# Allegro board USBHUB_V11A.brd
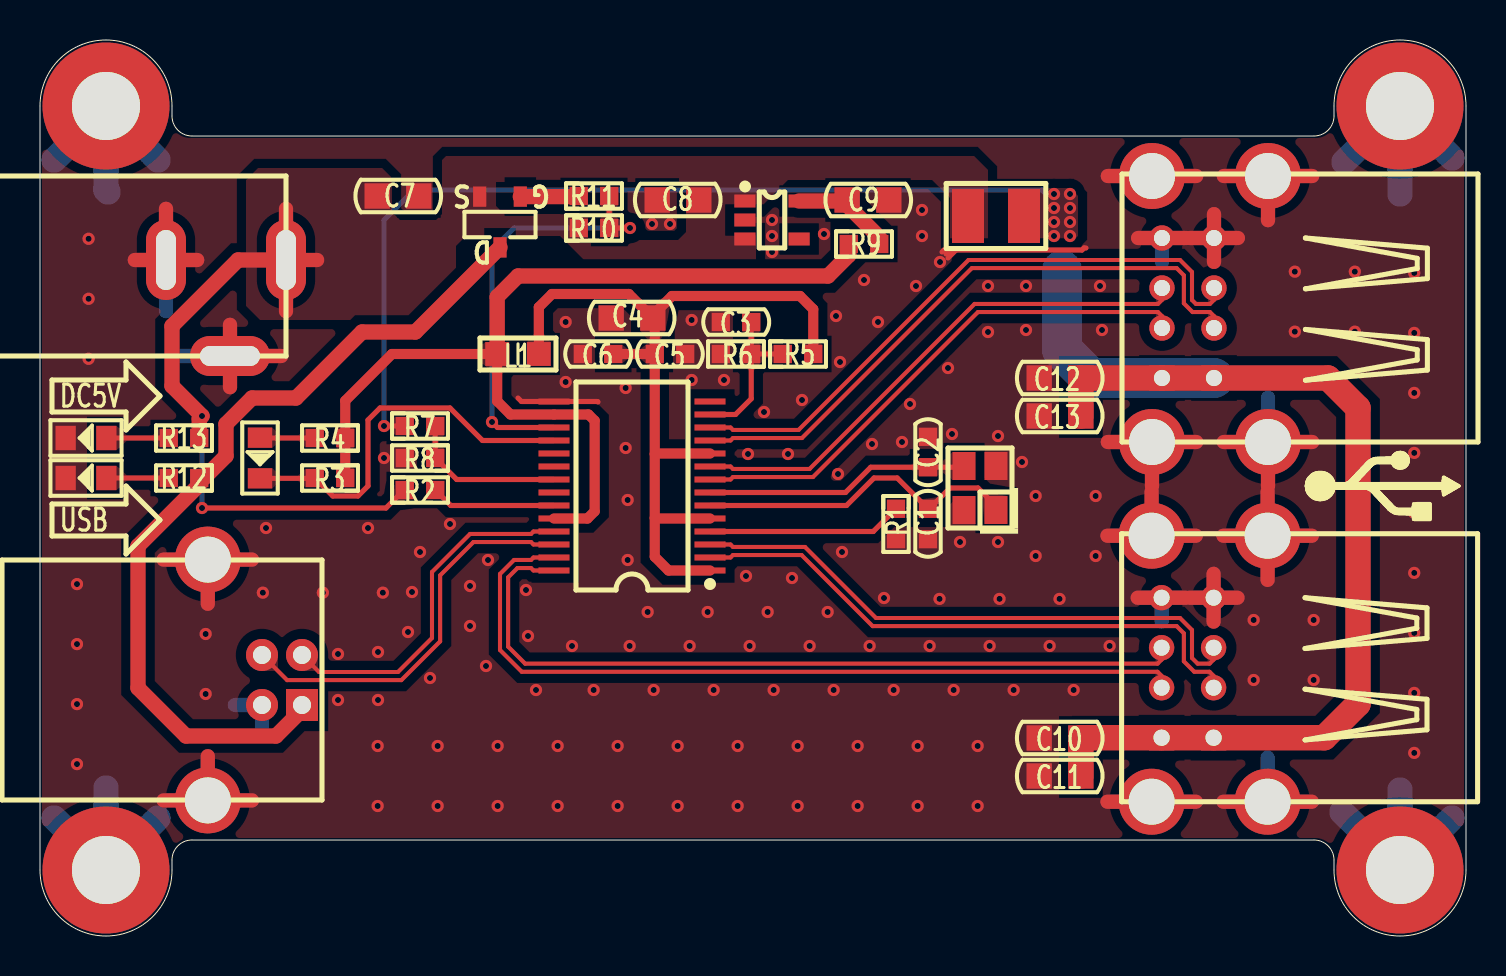
[diagram p0: board, top side]
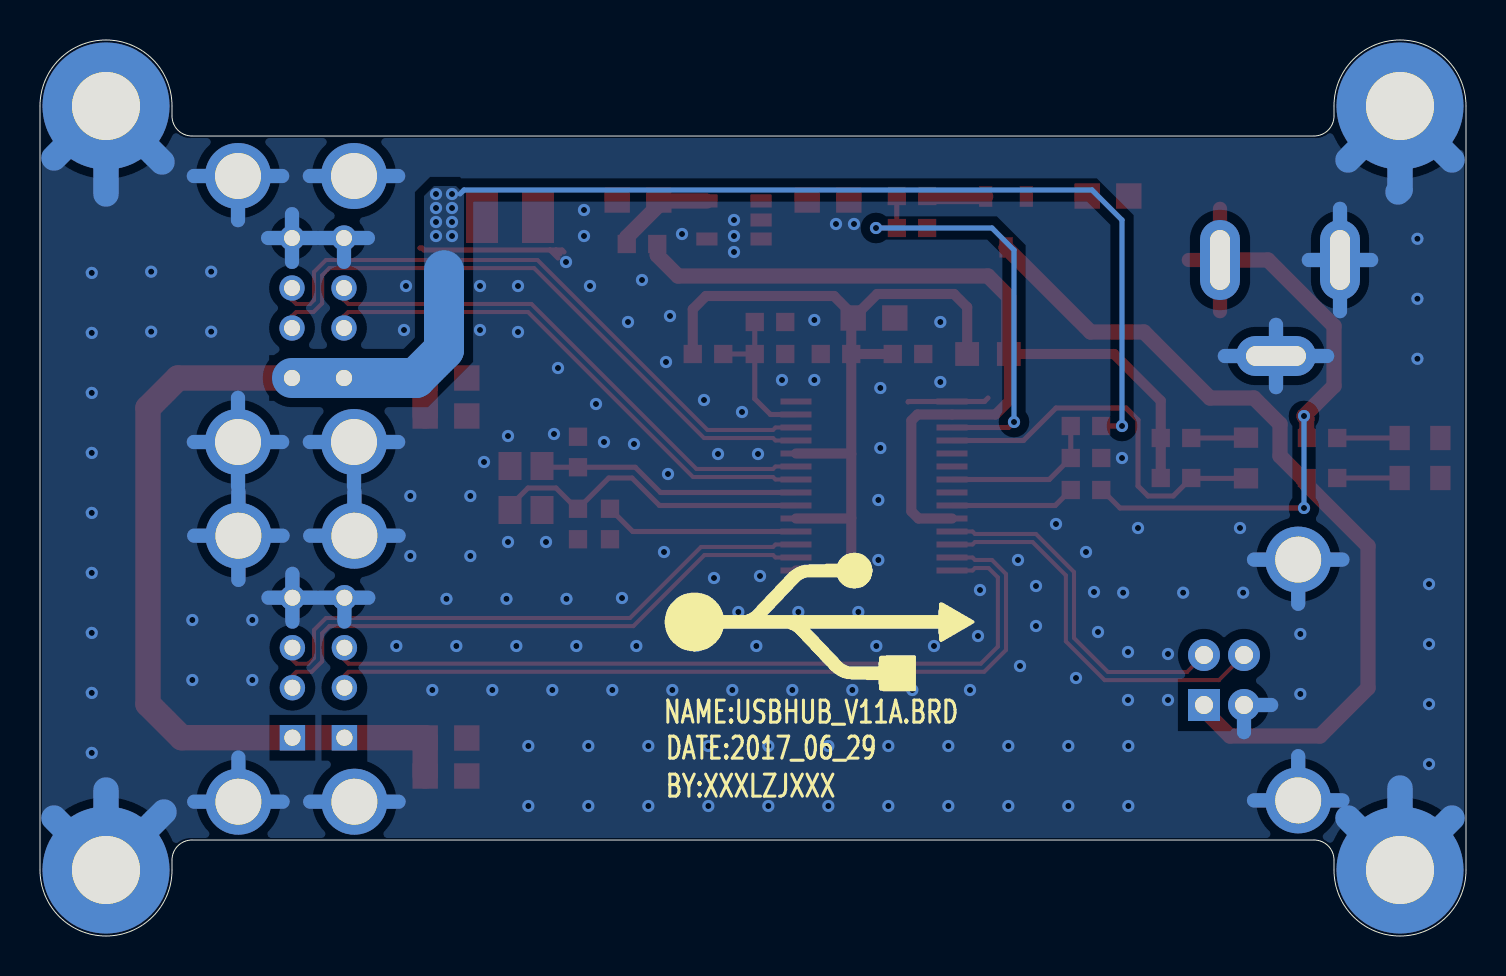
[diagram p1: board, bottom side, seen from below]

Outline 71.3 x 44.8 mm; copper layers: TOP, BOTTOM. Coordinates in mm from the lower left corner of the outline.
Outline path: 0,41.5 arc(0.97,43.83) 3.3,44.8 arc(5.63,43.83) 6.6,41.5 6.6,41 arc(6.89,40.29) 7.6,40 63.7,40 arc(64.41,40.29) 64.7,41 64.7,41.5 arc(65.67,43.83) 68,44.8 arc(70.33,43.83) 71.3,41.5 71.3,3.3 arc(70.33,0.97) 68,0 arc(65.67,0.97) 64.7,3.3 64.7,3.8 arc(64.41,4.51) 63.7,4.8 7.6,4.8 arc(6.89,4.51) 6.6,3.8 6.6,3.3 arc(5.63,0.97) 3.3,0 arc(0.97,0.97) 0,3.3 0,41.5

## Design rules (mm)
constraint set DEFAULT: min track width 0.203, pair gap 0.203
net group DP1: nets DM0 DP0
net group DP2: nets DM1 DP1
net group DP3: nets DM2 DP2
net group DP4: nets DM3 DP3
net group DP5: nets DM4 DP4

## Placement (name value [footprint] x y rotation side)
C1  20pF_50V  [CC0603]  44.4 20.6 90 top
C2  20pF_50V  [CC0603]  44.4 24.2 270 top
C3  1uF_50V  [CC0603]  34.8 30.7 0 top
C4  10uF_25V  [CC0805]  29.6 30.9 180 top
C5  0.1uF_50V  [CC0603]  31.5 29.1 180 top
C6  0.1uF_50V  [CC0603]  27.9 29.1 0 top
C7  10uF_25V  [CC0805]  17.9 37 0 top
C8  10uF_25V  [CC0805]  31.9 36.8 180 top
C9  10uF_25V  [CC0805]  41.4 36.8 0 top
C10  10uF_25V  [CC0805]  51 9.9 180 top
C11  10uF_25V  [CC0805]  51 8 180 top
C12  10uF_25V  [CC0805]  51 27.9 180 top
C13  10uF_25V  [CC0805]  51 26 180 top
D1  LED_GREEN  [LED0805]  11 23.9 270 top
D2  LED_GREEN  [LED0805]  2.3 22.9 180 top
D3  LED_GREEN  [LED0805]  2.3 24.9 180 top
DC1  -  [DC005]  6.3 33.8 0 top
F1  SMD1210-200  [SMD-1210]  47.8 36 180 top
L1  BEAD_BLM21PG600  [LC0805]  23.9 29.1 180 top
MH1  HOLD-M3  [HOLD250D134]  3.3 3.3 0 top
MH2  HOLD-M3  [HOLD250D134]  68 3.3 0 top
MH3  HOLD-M3  [HOLD250D134]  68 41.5 0 top
MH4  HOLD-M3  [HOLD250D134]  3.3 41.5 0 top
NOREF  -  []  3.3 0 90 top
NOREF#2  -  []  0 5.1 0 top
Q1  AO3415  [SOT23_GSD]  23 35.7 180 top
R1  680R  [RC0603]  42.8 20.6 90 top
R2  0R/NI  [RC0603]  19 22.3 180 top
R3  100K  [RC0603]  14.5 22.9 0 top
R4  1K  [RC0603]  14.5 24.9 0 top
R5  10K  [RC0603]  37.9 29.1 180 top
R6  47K  [RC0603]  34.8 29.1 0 top
R7  30K  [RC0603]  19 25.5 180 top
R8  30K  [RC0603]  19 23.9 0 top
R9  0R  [RC0603]  41.2 34.6 180 top
R10  510K  [RC0603]  27.7 35.4 180 top
R11  4.7K  [RC0603]  27.7 37 180 top
R12  2K  [RC0603]  7.2 22.9 0 top
R13  2K  [RC0603]  7.2 24.9 0 top
U1  X322512MSB4SI  [X-4P-3R2X2R5-SMD]  47 22.4 90 top
U2  GL850G  [TSSOP28]  29.6 22.5 90 top
U3  SPX3819M5-L-1-5/TR  [SOT23-5]  36.6 35.8 270 top
USB1  -  [USB-A-DOUBLE]  56.1 31.4 0 top
USB2  -  [USB-A-DOUBLE]  56.08 13.41 0 top
USB3  -  [USB-B]  13.1 12.8 270 top

## Library data of the parts
C1 C2 C7-C13 = CAP NP_2
C3 C5 C6 = CAP NP
C4 = C_Generic
D1-D3 = LED_4
DC1 = DC005
F1 = FUSE
L1 = IND_BEAD_0805_600OHM_200MA
MH1-MH4 = Hold_1
Q1 = MOS-P_0
R1-R13 = R_Generic
U1 = TSX-3225
U2 = GL850G
U3 = SPX3819M5-L-1-2
USB1 USB2 = USB-A-DOUBLE
USB3 = USB-B

## Footprints (pads in the part's own frame, mm; a bottom-side part is the same pattern mirrored in y, then rotated)
CC0603
  rect 0.914x0.914 smd: 1(-0.762,0) 2(0.762,0)
CC0805
  rect 1.27x1.27 smd: 1(-1.041,0) 2(1.041,0)
DC005
  oval 2x4 hole 1x3: 1(6,0) 2(0,0)
  oval 4x2 hole 3x1: 3(3.2,-4.8)
HOLD250D134
  round 6.35 hole 3.404: 1(0,0)
LC0805
  rect 1.194x1.194 smd: 1(-1.041,0) 2(1.041,0)
LED0805
  rect 1.016x1.219 smd: 1(-1.016,0) 2(1.016,0)
RC0603
  rect 0.914x0.914 smd: 1(-0.762,0) 2(0.762,0)
SMD-1210
  rect 1.6x2.7 smd: 1(-1.4,0) 2(1.4,0)
SOT23-5
  rect 0.65x1.06 smd: 1(-0.95,-1.354) 2(0,-1.354) 3(0.95,-1.354) 4(0.95,1.354) 5(-0.95,1.354)
SOT23_GSD
  rect 0.66x1.016 smd: 1(-1.016,-1.27) 2(1.016,-1.27) 3(0,1.27)
TSSOP28
  rect 0.3x1.55 smd: 1(-4.225,-3.9) 2(-3.575,-3.9) 3(-2.925,-3.9) 4(-2.275,-3.9) 5(-1.625,-3.9) 6(-0.975,-3.9) 7(-0.325,-3.9) 8(0.325,-3.9) 9(0.975,-3.9) 10(1.625,-3.9) 11(2.275,-3.9) 12(2.925,-3.9) 13(3.575,-3.9) 14(4.225,-3.9) 15(4.225,3.9) 16(3.575,3.9) 17(2.925,3.9) 18(2.275,3.9) 19(1.625,3.9) 20(0.975,3.9) 21(0.325,3.9) 22(-0.325,3.9) 23(-0.975,3.9) 24(-1.625,3.9) 25(-2.275,3.9) 26(-2.925,3.9) 27(-3.575,3.9) 28(-4.225,3.9)
USB-A-DOUBLE
  rect 1.27x1.27 hole 0.813: 1(2.6,-3.5) 5(0,-3.5)
  round 1.27 hole 0.8: 2(2.6,-1) 3(2.6,1) 4(2.6,3.5) 6(0,-1) 7(0,1) 8(0,3.5)
  round 3.3 hole 2.3: 9(-0.5,6.6) 10(5.3,6.6) 11(5.3,-6.7) 12(-0.5,-6.7)
USB-B
  rect 1.6x1.6 hole 0.9: 1(1.25,0)
  round 1.6 hole 0.9: 2(-1.25,0) 3(-1.25,-2) 4(1.25,-2)
  round 3.3 hole 2.3: 5(6.02,-4.71) 6(-6.02,-4.71)
X-4P-3R2X2R5-SMD
  rect 1.4x1.15 smd: 1(-1.1,-0.8) 2(1.1,-0.8) 3(1.1,0.8) 4(-1.1,0.8)

## Nets
AVDD: C4.1 C5.2 C6.2 L1.1 R5.1 U2.1 U2.5 U2.10
DVDD: L1.2(B) R3.2 R4.2 R9.2 U2.16 U2.24
GND: C1.1 C2.1 C3.1 C4.2 C5.1 C6.1 C7.2 C8.2 C9.2 C10.2 C11.2 C12.2 C13.2 D2.2(CATHODE) D3.2(CATHODE) DC1.2 DC1.3 MH1.1 MH2.1 MH3.1 MH4.1 R1.1 R6.1 R8.1 U1.2 U1.4 U2.15 U3.2 USB1.4 USB1.8 USB1.9 USB1.10 USB1.11 USB1.12 USB2.4 USB2.8 USB2.9 USB2.10 USB2.11 USB2.12 USB3.4 USB3.5 USB3.6
VCC: C7.1 C8.1 DC1.1 F1.2 Q1.2(S) R2.2 R10.2 R13.2 U3.1 U3.3
VCC_VOUT1: C10.1 C11.1 C12.1 C13.1 F1.1 R7.2 USB1.1 USB1.5(VCC_2) USB2.1 USB2.5(VCC_2)
B_VCC: Q1.3 R12.2 USB3.1(VBUS)
DM0: U2.25 USB3.2
DM1: U2.27 USB2.6
DM2: U2.2 USB2.2
DM3: U2.8 USB1.6
DM4: U2.11 USB1.2
DP0: U2.26 USB3.3
DP1: U2.28 USB2.7
DP2: U2.3 USB2.3
DP3: U2.9 USB1.7
DP4: U2.12 USB1.3
OC1#: R7.1 R8.2 U2.21
PGANG: D1.2(CATHODE) R3.1 U2.18
PSELF: R10.1 R11.1 U2.17
RESET#: C3.2 R5.2 R6.2 U2.13
X1: C1.2 U1.1 U2.6
X2: C2.2 U1.3(OUT2) U2.7(X2)
N16723357: C9.1 R9.1 U3.5(VOUT)
N16762604: D2.1 R12.1
N16762654: D3.1 R13.1
N16767407: R2.1 U2.23
N16767619: R1.2 U2.4
N16774538: Q1.1 R11.2
N16775290: D1.1 R4.1

Pads without a net: U2 14 19 20 22; U3 4

## Via types
v1: diameter 0.61, hole 0.305, TOP to BOTTOM, 160 vias

## Routing (per net, layer and track width the routed paths; a pad name or vN(x,y) marks a point on that pad's centre or on a via; arc(x,y) is an arc through that point)
AVDD: length 42.5
  TOP w0.508: C4.1 30.74,30.8 C5.2 ; C4.1 30.64,31.04 31.6,32 38,32 38.66,31.34 R5.1 ; C4.1 29.44,32.1 25.6,32.1 24.94,31.44 L1.1 ; U2.1 31.43,18.27 30.74,18.96 30.74,20.9 ; 30.74,20.9 30.76,20.88 U2.5 ; 30.74,20.9 30.74,24.1 ; U2.10 30.76,24.12 30.74,24.1 ; C6.2 C5.2 ; C5.2 30.74,24.1
DVDD: length 48.6
  TOP w0.508: U2.24 27.38,20.88 27.73,21.23 27.73,25.77 27.43,26.07 U2.16 23.52,26.07 22.86,26.74 L1.2 17.6,29.1 15.26,26.76 R4.2 R3.2
  TOP w0.762: R9.2 40.44,34.04 39.4,33 23.9,33 22.86,31.96 L1.2
GND: length 248.9
  TOP w0.254: 45.8,34.3 45.4,33.9 ; 45.8,34.3 52.1,34.3 52.2,34.4 52.3,34.4 ; 45.8,34.3 45.5,34.3 ; 23.9,26.9 24.07,26.73 U2.15 27.88,26.73 27.9,26.7 ; 45.1,34.2 45.2,34.3 45.5,34.3 ; 45.5,34.3 45.3,34.1
  TOP w0.711: USB2.9 55.58,22.22 ; USB2.9 53.37,20.01 ; USB2.9 57.79,20.01 ; 53.39,38 USB1.9 57.81,38 ; 8.39,16.61 USB3.6 ; USB3.6 6.18,18.82 ; USB3.6 10.6,18.82 ; USB1.10 63.61,38 ; USB1.10 59.19,38 ; USB1.10 61.4,35.79 ; 53.37,6.71 USB2.12 57.79,6.71 ; 58.7,33.71 USB1.4 ; USB1.4 57.51,34.9 ; USB1.4 58.7,36.09 ; USB1.4 59.89,34.9 ; 9.5,27.44 DC1.3 ; DC1.3 9.5,30.56 ; DC1.3 12.06,29 ; USB2.10 61.38,22.22 ; USB2.10 61.38,17.81 ; USB2.10 63.59,20.01 ; USB2.10 59.17,20.01 ; 57.27,16.91 USB2.8 54.89,16.91 ; USB1.11 63.61,24.7 ; USB1.11 59.19,24.7 ; USB1.11 61.4,22.49 ; 57.29,34.9 USB1.8 54.91,34.9 ; USB3.5 8.39,8.99 ; USB3.5 10.6,6.78 ; USB3.5 6.18,6.78 ; USB2.4 59.87,16.91 ; USB2.4 58.68,18.11 ; USB2.4 57.49,16.91 ; USB2.4 58.68,15.72 ; DC1.2 7.86,33.8 ; DC1.2 4.74,33.8 ; DC1.2 6.3,36.36 ; 55.6,22.49 USB1.12 ; USB1.12 53.39,24.7 ; USB1.12 57.81,24.7 ; 63.59,6.71 USB2.11 59.17,6.71
  BOTTOM w0.711: 59.19,24.7 USB1.11 ; USB1.11 61.4,26.91 ; USB1.11 63.61,24.7 ; USB1.11 61.4,22.49 ; 4.74,33.8 DC1.2 ; DC1.2 7.86,33.8 ; DC1.2 6.3,31.24 ; DC1.2 6.3,36.36 ; 61.4,35.79 USB1.10 ; USB1.10 59.19,38 ; USB1.10 63.61,38 ; USB1.12 57.81,24.7 ; USB1.12 53.39,24.7 ; USB1.12 55.6,22.49 ; 9.74,11.55 USB3.4 11.1,10.19 ; USB2.8 57.27,16.91 ; USB2.8 54.89,16.91 ; USB2.8 56.08,15.72 ; 9.5,27.44 DC1.3 ; DC1.3 6.94,29 ; DC1.3 12.06,29 ; DC1.3 9.5,30.56 ; 53.37,20.01 USB2.9 ; USB2.9 55.58,22.22 ; USB2.9 57.79,20.01 ; USB2.11 63.59,6.71 ; USB2.11 61.38,8.92 ; USB2.11 59.17,6.71 ; 57.49,16.91 USB2.4 ; USB2.4 58.68,18.11 ; USB2.4 59.87,16.91 ; USB2.4 58.68,15.72 ; USB3.5 8.39,8.99 ; USB3.5 6.18,6.78 ; USB3.5 10.6,6.78 ; 61.38,17.81 USB2.10 ; USB2.10 63.59,20.01 ; USB2.10 59.17,20.01 ; USB2.10 61.38,22.22 ; 56.1,33.71 USB1.8 ; USB1.8 57.29,34.9 ; USB1.8 54.91,34.9 ; 58.7,33.71 USB1.4 ; USB1.4 57.51,34.9 ; USB1.4 59.89,34.9 ; USB1.4 58.7,36.09 ; 57.81,38 USB1.9 53.39,38 ; USB3.6 10.6,18.82 ; USB3.6 6.18,18.82 ; USB3.6 8.39,16.61 ; 53.37,6.71 USB2.12 57.79,6.71
  BOTTOM w1.27: MH1.1 3.3,7.4 ; MH1.1 5.9,5.9 ; MH1.1 0.7,5.9 ; 3.4,37.2 3.3,37.3 3.3,41.4 ; MH4.1 3.3,41.4 ; 3.3,41.4 5.9,38.8 ; 3.3,41.4 0.7,38.8 ; MH3.1 70.6,38.9 ; MH3.1 65.2,38.7 ; MH3.1 68,37.1 ; MH2.1 70.6,5.9 ; MH2.1 68,7.3 ; MH2.1 65.1,6.2
  vias: v1(1.85,17.59) v1(1.85,14.59) v1(1.85,11.59) v1(1.85,8.59) v1(2.43,34.86) v1(2.43,31.86) v1(2.43,28.86) v1(8.28,15.1) v1(8.28,12.1) v1(11.14,17.17) v1(11.3,20.4) v1(14.14,17.17) v1(14.9,14.1) v1(14.9,11.8) v1(16.4,20.4) v1(16.9,14.2) v1(16.9,11.8) v1(16.88,9.5) v1(16.88,6.5) v1(17.14,17.17) v1(17.2,23.9) v1(18.4,15.2) v1(18.6,17.2) v1(19,19.2) v1(19.5,12.9) v1(19.88,9.5) v1(19.88,6.5) v1(20.5,20.6) v1(21.5,17.5) v1(21.5,15.5) v1(22.3,13.5) v1(22.4,18.8) v1(22.88,9.5) v1(22.88,6.5) v1(24.3,17.3) v1(24.4,15) v1(24.8,12.3) v1(25.88,9.5) v1(25.88,6.5) v1(26.28,30.7) v1(26.28,27.7) v1(26.6,14.5) v1(27.68,12.3) v1(28.88,9.5) v1(28.88,6.5) v1(29.28,27.4) v1(29.28,24.4) v1(29.38,21.8) v1(29.38,18.8) v1(29.48,14.5) v1(30.38,16.2) v1(30.6,35.6) v1(30.68,12.3) v1(31.5,35.6) v1(31.88,9.5) v1(31.88,6.5) v1(32.48,14.5) v1(32.58,30.8) v1(32.58,27.8) v1(33.38,16.2) v1(33.68,12.3) v1(34.2,27.8) v1(34.88,9.5) v1(34.88,6.5) v1(35.3,18) v1(35.4,24.1) v1(35.48,14.5) v1(36.2,26.2) v1(36.38,16.2) v1(36.6,35.8) v1(36.6,35) v1(36.6,34.2) v1(36.68,12.3) v1(37.4,24.1) v1(37.6,17.9) v1(37.88,9.5) v1(37.88,6.5) v1(38.1,26.8) v1(38.48,14.5) v1(39.2,35.1) v1(39.38,16.2) v1(39.68,12.3) v1(39.8,31) v1(39.9,23.1) v1(40,28.7) v1(40.1,19.2) v1(40.88,9.5) v1(40.88,6.5) v1(41.2,32.8) v1(41.48,14.5) v1(41.6,24.6) v1(41.9,30.7) v1(42.2,16.9) v1(42.68,12.3) v1(43.1,24.7) v1(43.5,26.6) v1(43.8,32.5) v1(43.88,9.5) v1(43.88,6.5) v1(44.1,36.3) v1(44.1,35) v1(44.48,14.5) v1(45,33.7) v1(44.98,16.86) v1(45.4,28.4) v1(45.6,25.1) v1(45.68,12.3) v1(46,19.7) v1(46.88,9.5) v1(46.88,6.5) v1(47.4,32.5) v1(47.4,30.2) v1(47.48,14.5) v1(47.9,25) v1(47.9,19.7) v1(47.98,16.86) v1(48.68,12.3) v1(49.1,23.7) v1(49.3,32.5) v1(49.3,30.3) v1(49.78,22) v1(49.78,19) v1(50.48,14.5) v1(50.98,16.86) v1(51.68,12.3) v1(52.78,22) v1(52.78,19) v1(53,32.5) v1(53.1,30.3) v1(53.48,14.5) v1(60.68,15.8) v1(60.68,12.8) v1(62.74,33.22) v1(62.74,30.22) v1(63.68,15.8) v1(63.68,12.8) v1(65.74,33.22) v1(65.74,30.22) v1(68.71,33.15) v1(68.71,30.15) v1(68.71,27.15) v1(68.71,24.15) v1(68.71,21.15) v1(68.71,18.15) v1(68.71,15.15) v1(68.71,12.15) v1(68.71,9.15)
VCC: length 35.1
  TOP w0.254: v1(8.1,21.4) 17.3,21.4 18.2,22.3 R2.2
  TOP w0.711: 12.3,31.24 DC1.1 ; DC1.1 12.3,36.36 ; DC1.1 13.86,33.8
  TOP w0.762: DC1.1 9.9,33.8 6.6,30.5 6.6,27.5 v1(8.1,26) 7.96,25.86 R13.2
  BOTTOM w0.254: v1(8.1,21.4) v1(8.1,26)
VCC_VOUT1: length 104.9
  TOP w0.254: R7.2 v1(17.2,25.5)
  TOP w1.27: C11.1 C10.1 52.06,9.91 USB2.5 USB2.1 64.21,9.91 65.9,11.6 65.9,26.4 64.4,27.9 USB1.1 USB1.5 C12.1 C13.1
  BOTTOM w0.254: 50.3,37.1 50.1,37.3 18.7,37.3 17.2,35.8 v1(17.2,25.5)
  BOTTOM w2: 51.1,33.29 51.1,29.31 52.51,27.9 USB1.5 USB1.1
  vias: v1(50.7,37.1) v1(50.7,36.4) v1(50.7,35.7) v1(50.7,35) v1(51.5,37.1) v1(51.5,36.4) v1(51.5,35.7) v1(51.5,35)
B_VCC: length 42.5
  TOP w0.762: Q1.3 18.77,30.2 16.1,30.2 12.8,26.9 10.6,26.9 9.3,25.6 9.3,24 8.2,22.9 R12.2 7.96,22.56 4.9,19.5 4.9,12.4 7.3,10 11.8,10 13.1,11.3 USB3.1
DM0: length 17.8
  TOP w0.203: USB3.2 13.95,13.2 17.9,13.2 19.6,14.9 19.6,18.2 21.5,20.1 24.55,20.1 24.67,20.23 U2.25
DM1: length 41.1
  TOP w0.203: USB2.6 56.08,13.01 55.88,13.21 24.09,13.21 23,14.3 23,18.1 23.7,18.8 24.55,18.8 24.67,18.93 U2.27
DM2: length 29.1
  TOP w0.203: U2.2 34.53,18.93 34.65,19.05 38.08,19.05 41.63,15.49 56.83,15.49 57.19,15.13 57.19,13.73 57.71,13.21 58.48,13.21 58.68,13.01 USB2.2
DM3: length 26.7
  TOP w0.203: USB1.6 56.1,30.99 55.9,31.2 46.9,31.2 38.65,22.95 34.65,22.95 34.53,22.82 U2.8
DM4: length 31.2
  TOP w0.203: U2.11 34.53,24.77 34.65,24.9 38.1,24.9 46.59,33.39 56.83,33.39 57.19,33.03 57.19,31.63 57.63,31.2 58.5,31.2 58.7,30.99 USB1.2
DP0: length 20
  TOP w0.203: USB3.3 12.36,12.79 18.07,12.79 20.01,14.73 20.01,18.03 21.67,19.7 24.55,19.7 24.67,19.57 U2.26
DP1: length 39.7
  TOP w0.203: U2.28 24.67,18.27 24.55,18.4 23.87,18.4 23.41,17.93 23.41,14.47 24.26,13.62 55.88,13.62 56.08,13.82 USB2.7
DP2: length 29.1
  TOP w0.203: U2.3 34.53,19.57 34.65,19.45 38.25,19.45 41.8,15.9 57,15.9 57.6,15.3 57.6,13.9 57.88,13.62 58.48,13.62 58.68,13.82 USB2.3
DP3: length 26.7
  TOP w0.203: USB1.7 56.1,31.81 55.9,31.6 46.73,31.6 38.48,23.35 34.65,23.35 34.53,23.48 U2.9
DP4: length 31.2
  TOP w0.203: U2.12 34.53,25.43 34.65,25.3 37.93,25.3 46.43,33.8 57,33.8 57.6,33.2 57.6,31.8 57.8,31.6 58.5,31.6 58.7,31.81 USB1.3
OC1#: length 8
  TOP w0.254: R7.1 R8.2 20.84,22.82 U2.21
PGANG: length 19.5
  TOP w0.254: D1.2 13.72,22.88 R3.1 14.64,22 15.9,22 16.4,22.5 16.4,25.8 17,26.4 20.5,26.4 22.12,24.77 U2.18
PSELF: length 21.8
  TOP w0.254: U2.17 22.88,25.43 v1(22.6,25.7) ; R11.1 R10.1 v1(29.5,35.4)
  BOTTOM w0.254: v1(22.6,25.7) 22.6,34.3 23.7,35.4 v1(29.5,35.4)
RESET#: length 7.8
  TOP w0.254: U2.13 34.77,26.07 35.56,26.86 R6.2 ; R6.2 R5.2 ; R6.2 C3.2
X1: length 16.5
  TOP w0.254: U2.6 40.33,21.52 41.7,22.9 42.86,22.9 C1.2 44.46,21.36 45.5,22.4 46.9,22.4 47.8,21.5 U1.1
X2: length 13.2
  TOP w0.254: U2.7 40.27,22.18 41.54,23.44 C2.2 46.14,23.44 U1.3
N16723357: length 5.3
  TOP w0.762: R9.1 41.96,34.94 40.36,36.54 C9.1 40.31,36.75 U3.5
N16762604: length 3.1
  TOP w0.254: D2.1 R12.1
N16762654: length 3.1
  TOP w0.254: R13.1 D3.1
N16767407: length 6.3
  TOP w0.254: U2.23 20.54,21.52 R2.1
N16767619: length 9.8
  TOP w0.254: R1.2 41.66,20.23 U2.4
N16774538: length 2.9
  TOP w0.762: R11.2 26.91,36.97 Q1.1
N16775290: length 2.7
  TOP w0.254: D1.1 11.02,24.9 R4.1

## Copper pours and planes (outline as drawn; the poured copper is in the pictures)
GND on TOP: 6.5,3.8 6.8,4.6 7.6,4.9 63.7,4.9 64.49,4.59 64.8,3.8 71.2,3.8 71.2,41 64.8,41 64.5,40.2 63.7,39.9 7.6,39.9 6.8,40.2 6.5,41 0.1,41 0.1,3.8 ; 13 cut-outs
GND on BOTTOM: 6.5,3.8 6.8,4.6 7.6,4.9 63.7,4.9 64.49,4.59 64.8,3.8 71.2,3.8 71.2,41 64.8,41 64.5,40.2 63.7,39.9 7.6,39.9 6.8,40.2 6.5,41 0.1,41 0.1,3.8
VCC on TOP: 11,30.8 10.3,31.5 10.3,37.8 10.9,38.4 17.1,38.4 17.6,37.9 17.6,36.2 18,35.8 19.8,35.8 20.1,36.1 20.1,38.8 20.3,39 46.7,39 47.4,38.3 47.4,34.5 45.6,34.5 45.5,34.6 45.5,36.9 44.6,37.8 37.4,37.8 36.1,36.5 35.9,36.5 35.8,36.4 34.5,36.4 34.3,36.2 34.3,35.7 34.8,35.2 35.8,35.2 35.8,33.7 35.6,33.5 27.5,33.5 26,35 21.3,35 20.8,34.5 20.8,31.4 20.2,30.8 ; 1 cut-out
VCC_VOUT1 on TOP: 48.4,34.7 51.6,34.7 51.9,35 51.9,37 51.5,37.4 48.4,37.4
VCC_VOUT1 on BOTTOM: 52.1,33 52.1,37 51.6,37.5 50.5,37.5 50.1,37.1 50.1,33.2 50.3,33

Small or netless copper shapes (teardrops, artwork), in the pictures only: 72 on TOP, 5 on BOTTOM

## Text on the board
Ref Des/Silkscreen Bottom: DATE:2017_06_29 | BY:XXXLZJXXX | NAME:USBHUB_V11A.BRD
Ref Des/Silkscreen Top: DC5V | USB
NCLEGEND-1-2: FIGURE | SIZE | 0.3048 | 0.8 | 0.8128 | 0.9 | 2.3 | 3.4036 | 3.0x1.0 | DRILL CHART: TOP to BOTTOM | ALL UNITS ARE IN MILLIMETERS | PLATED | QTY | 160 | 12 | 4 | 10 | 2 | 1
